# EAGLE board jataricartv5 (EAGLE 5.04)
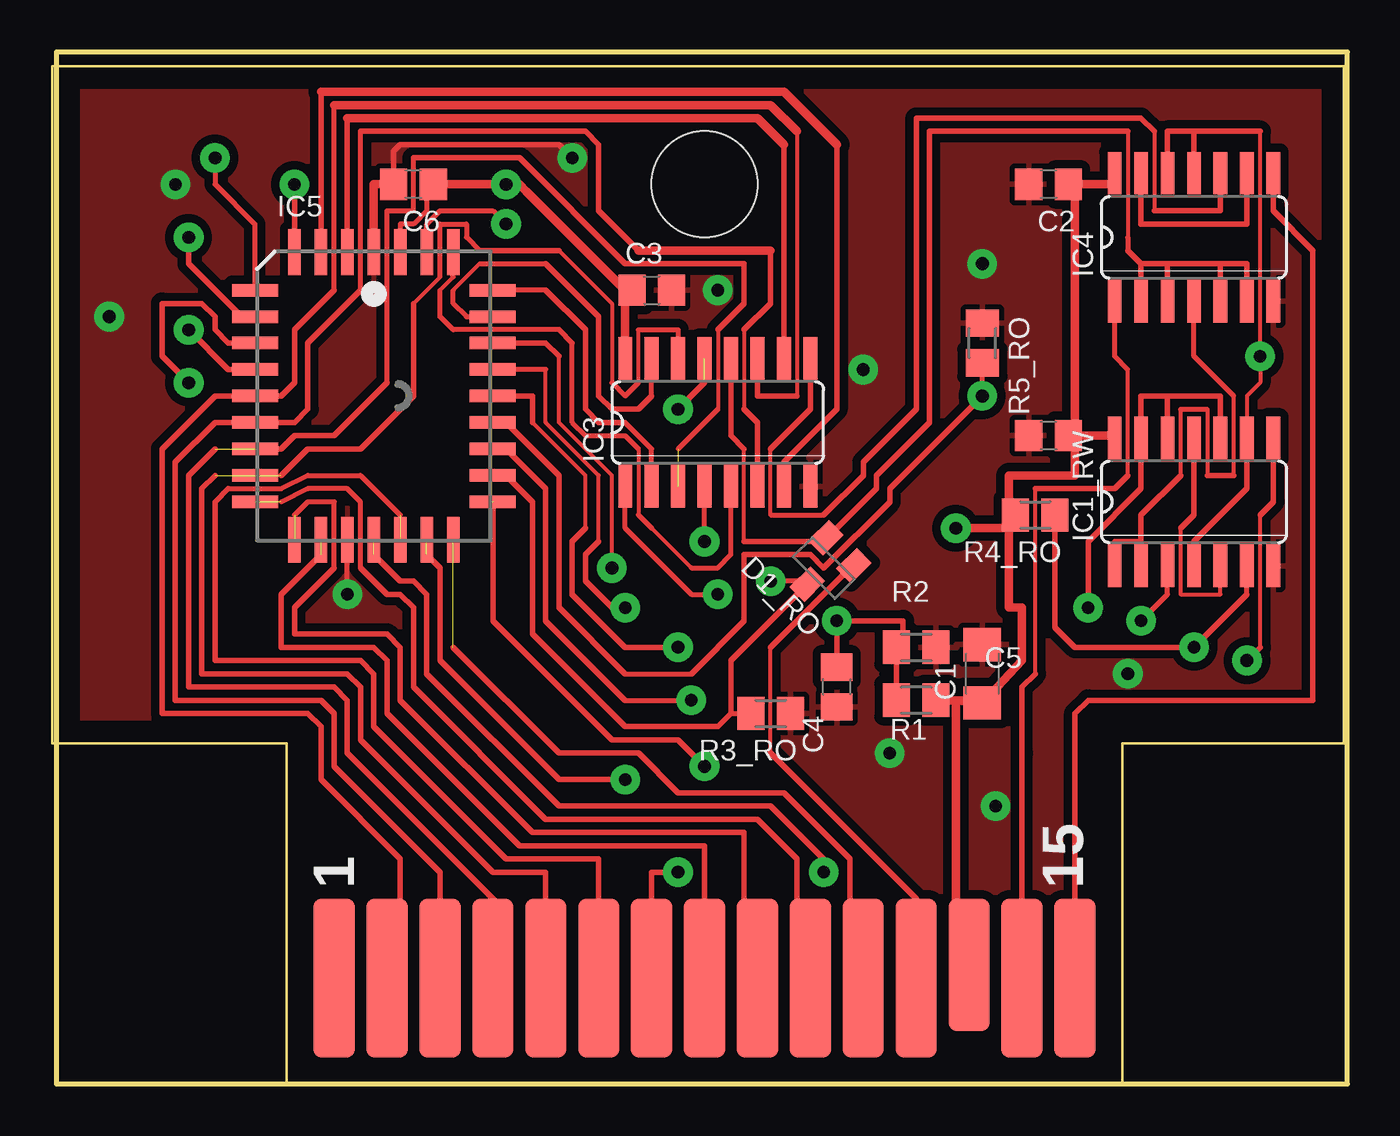
[diagram p0: board, top side]
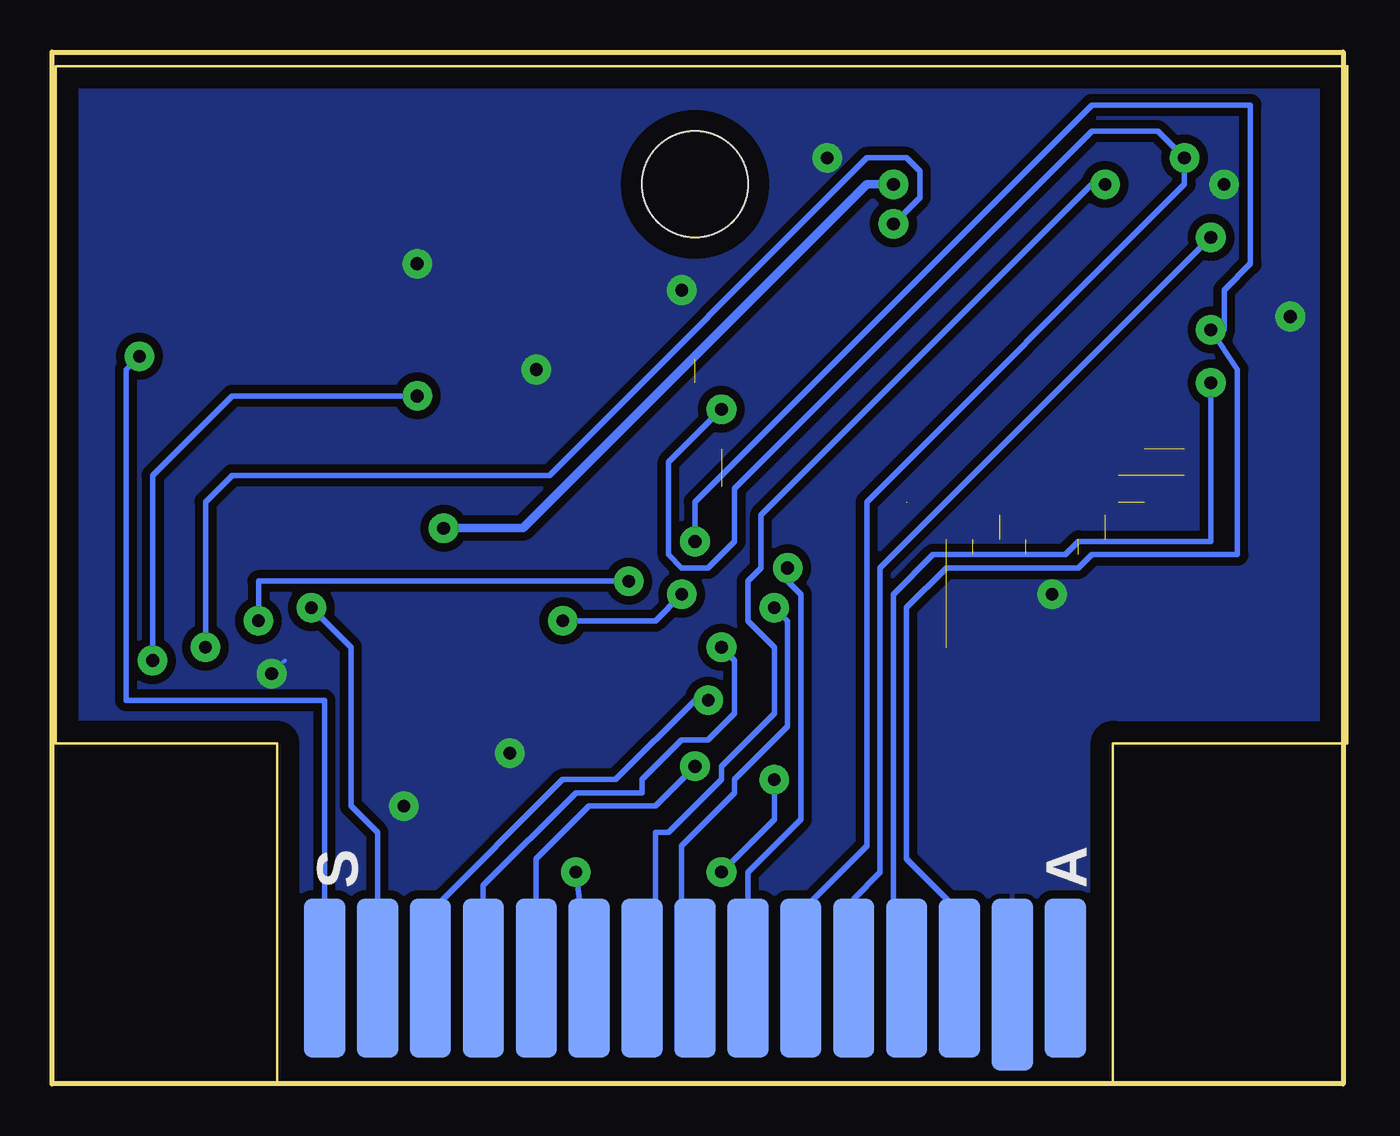
[diagram p1: board, bottom side, seen from below]

Size 61.98 x 49.53 mm. Coordinates in mm from the lower left corner, seen from the top.
Outline: 0,0 61.98,0 61.98,49.53 0,49.53 0,0
Copper layers (1*16): Top 0.035mm / dielectric 1.5mm / Bottom 0.035mm
Design rules "default *": minimum track width 8mil, minimum drill 24mil, track to track 8mil, track to pad 8mil, pad to pad 8mil, via to via 8mil, smd to smd 8mil, copper to edge 40mil, drill to drill 8mil, minimum pad ring 10mil, minimum via ring 20mil, stop-mask expansion 4mil, vias tented up to drill 0mil, thermal gap 10mil
Net classes: 1 power: clearance 0.406 mm
Holes 5.08 mm at 31.11,43.18

## Footprints (pad centres in the part's own frame; a part is rotated, then mirrored left to right if it is on the bottom)
C1206 = smd 1.6 x 1.8: 1 -1.4,0; 2 1.4,0
C0805 = smd 1.3 x 1.5: 1 -0.95,0; 2 0.95,0
CARTRIDGE = smd 1.981 x 7.62: 1 -17.78,-38.1; 2 -15.24,-38.1; 3 -12.7,-38.1; 4 -10.16,-38.1; 5 -7.62,-38.1; 6 -5.08,-38.1; 7 -2.54,-38.1; 8 0,-38.1; 9 2.54,-38.1; 10 5.08,-38.1; 11 7.62,-38.1; 12 10.16,-38.1; 14 15.24,-38.1; 15 17.78,-38.1 | smd 1.981 x 6.35: 13 12.7,-37.465 | smd 1.981 x 7.62 bottom: A -17.78,-38.1; C -12.7,-38.1; D -10.16,-38.1; E -7.62,-38.1; F -5.08,-38.1; H -2.54,-38.1; J 0,-38.1; K 2.54,-38.1; L 5.08,-38.1; M 7.62,-38.1; N 10.16,-38.1; P 12.7,-38.1; R 15.24,-38.1; S 17.78,-38.1 | smd 1.981 x 8.255 bottom: B -15.24,-38.417
SOT23C = smd 1 x 1.4: 1 -0.95,-1.1; 2 0.95,-1.1; 3 0,1.1
SO14 = smd 0.66 x 2.032: 1 -3.81,-3.073; 2 -2.54,-3.073; 3 -1.27,-3.073; 4 0,-3.073; 5 1.27,-3.073; 6 2.54,-3.073; 7 3.81,-3.073; 8 3.81,3.073; 9 2.54,3.073; 10 1.27,3.073; 11 0,3.073; 12 -1.27,3.073; 13 -2.54,3.073; 14 -3.81,3.073
SO16 = smd 0.66 x 2.032: 1 -4.445,-3.073; 2 -3.175,-3.073; 3 -1.905,-3.073; 4 -0.635,-3.073; 5 0.635,-3.073; 6 1.905,-3.073; 7 3.175,-3.073; 8 4.445,-3.073; 9 4.445,3.073; 10 3.175,3.073; 11 1.905,3.073; 12 0.635,3.073; 13 -0.635,3.073; 14 -1.905,3.073; 15 -3.175,3.073; 16 -4.445,3.073
PLCC32R = smd 0.6 x 2.2: 1 0,6.9; 2 -1.27,6.9; 3 -2.54,6.9; 4 -3.81,6.9; 14 -3.81,-6.9; 15 -2.54,-6.9; 16 -1.27,-6.9; 17 0,-6.9; 18 1.27,-6.9; 19 2.54,-6.9; 20 3.81,-6.9; 30 3.81,6.9; 31 2.54,6.9; 32 1.27,6.9 | smd 2.2 x 0.6: 5 -5.7,5.08; 6 -5.7,3.81; 7 -5.7,2.54; 8 -5.7,1.27; 9 -5.7,0; 10 -5.7,-1.27; 11 -5.7,-2.54; 12 -5.7,-3.81; 13 -5.7,-5.08; 21 5.7,-5.08; 22 5.7,-3.81; 23 5.7,-2.54; 24 5.7,-1.27; 25 5.7,0; 26 5.7,1.27; 27 5.7,2.54; 28 5.7,3.81; 29 5.7,5.08
M0805 = smd 1.3 x 1.6: 1 -0.95,0; 2 0.95,0

## Placement (x,y rotation side)
C1  10u  [C1206]  44.45,19.68 90 top
C2  100n  [C0805]  47.62,43.18 180 top
C3  100n  [C0805]  28.57,38.1 0 top
C4  1u  [C0805]  37.47,19.05 90 top
C5  100n  [C0805]  47.62,31.11 180 top
C6  100n  [C0805]  17.14,43.18 180 top
CART1  CARTRIDGE  [CARTRIDGE]  31.11,43.18 0 top
D1_RO  [SOT23C]  36.83,24.77 135 top
IC1_RW  7400D  [SO14]  54.61,27.94 0 top
IC3  74174D  [SO16]  31.75,31.75 0 top
IC4  7402D  [SO14]  54.61,40.64 0 top
IC5  AM29F040J  [PLCC32R]  15.24,33.02 0 top
R1  100k  [M0805]  41.27,18.41 0 top
R2  1M  [M0805]  41.27,20.95 180 top
R3_RO  4.7k  [M0805]  34.29,17.78 180 top
R4_RO  4.7k  [M0805]  46.99,27.3 180 top
R5_RO  4.7k  [M0805]  44.45,35.56 270 top

## Library data of the parts
C1-C6 R1 R2 R3_RO R4_RO R5_RO = rcl
CART1 = atari1
D1_RO = semicon-smd-ipc
IC1_RW IC3 IC4 = 74xx-eu
IC5 = am29-memory

## Nets
_CCTL: CART1.15 IC4.8
_CE: CART1.12 D1_RO.1
A0: CART1.5 IC3.14 IC5.12
A1: CART1.4 IC3.3 IC5.11
A2: CART1.3 IC3.6 IC5.10
A3: CART1.2 IC3.11 IC5.9
A4: CART1.C IC3.4 IC5.8
A5: CART1.D IC5.7
A6: CART1.E IC5.6
A7: CART1.F IC3.13 IC5.5
A8: CART1.H IC5.27
A9: CART1.J IC5.26
A10: CART1.P IC5.23
A11: CART1.N IC5.25
A12: CART1.K IC5.4
CLK: IC3.9 IC4.10
CLR: C4.2 IC3.1 R1.1 R2.2
D0: CART1.10 IC5.13
D1: CART1.9 IC5.14
D2: CART1.8 IC5.15
D3: CART1.L IC5.17
D4: CART1.6 IC5.18
D5: CART1.7 IC5.19
D6: CART1.11 IC5.20
D7: CART1.M IC5.21
GND [power]: C1.2 C2.2 C3.2 C4.1 C5.2 C6.2 CART1.B IC1_RW.7 IC3.8 IC4.7 IC5.1 IC5.16 R2.1 R3_RO.1 R5_RO.1
N$1: IC3.15 IC5.28
N$2: IC3.5 IC5.30
N$3: IC3.2 IC5.29
N$4: IC3.7 IC5.3
N$5: IC3.10 IC5.2
N$6: D1_RO.3 IC1_RW.3 IC5.22 R3_RO.2
N$7: CART1.14 IC4.1
N$8: IC1_RW.1 IC1_RW.2 IC4.4
N$9: IC1_RW.6 IC5.31 R4_RO.1
N$10: IC1_RW.8 IC5.24 R5_RO.2
N$11: IC1_RW.5 IC1_RW.11
N$12: IC4.9 IC4.13
PHI2: CART1.S IC1_RW.4 IC1_RW.9 IC4.11 IC4.12
R_W: CART1.R IC1_RW.10 IC1_RW.12 IC1_RW.13
RD5: D1_RO.2 IC3.12 IC4.2 IC4.3 IC4.5 IC4.6
VCC: C1.1 C2.1 C3.1 C5.1 C6.1 CART1.13 IC1_RW.14 IC3.16 IC4.14 IC5.32 R1.2 R4_RO.2

## Tracks (layer width: path | path; a pad name or v marks a point on that pad's centre or on a via)
_CCTL
  Top 0.229: 58.42,43.18 IC4.8
  Top 0.254: CART1.15 48.9,16.51 48.9,17.78 49.53,18.41 60.33,18.41 60.33,40.01 58.42,41.91 58.42,43.18
_CE
  Top 0.203: 34.29,15.88 34.29,20.95
  Top 0.229: 41.27,3.17 CART1.12 41.27,8.89 | 38.1,24.77 38.17,24.77 D1_RO.1
  Top 0.254: 41.27,8.89 34.29,15.88 | 34.29,20.95 38.1,24.77
A0  (2 unrouted)
  Top 0.203: 24.13,40.01 26.67,37.47 26.67,33.66 | 17.14,37.47 18.41,38.73 | 27.94,33.66 27.94,36.2
  Top 0.229: 20.32,40.01 19.68,40.64 19.68,41.27 18.41,41.27 18.41,38.73 | 26.67,33.66 27.3,33.02 27.94,33.66 | 27.94,36.2 29.84,36.2 IC3.14
  Top 0.254: 20.32,40.01 24.13,40.01 | 17.14,37.47 17.14,33.02 14.61,30.48 12.06,30.48 10.79,29.21 | 7.62,29.21 6.99,28.57 6.99,19.68 13.97,19.68 14.61,19.05 14.61,16.51 20.95,10.16 23.5,10.16 CART1.5
A1  (2 unrouted)
  Top 0.203: 31.75,36.2 31.75,32.38
  Top 0.229: CART1.4 20.95,3.81 21.59,3.81 21.59,8.26 | 31.75,32.38 29.84,30.48 | 15.88,33.66 15.88,41.91 17.14,41.91 17.14,44.45
  Top 0.254: 21.59,8.26 13.97,15.88 13.97,18.41 13.34,19.05 6.35,19.05 6.35,29.21 7.62,30.48 | 31.75,36.2 33.02,37.47 33.02,39.37 27.3,39.37 22.23,44.45 17.14,44.45 | 15.88,33.66 13.34,31.11 11.43,31.11 10.79,30.48 IC5.11
A2
  Top 0.203: 33.02,36.2 33.02,32.38
  Top 0.229: 19.05,4.45 CART1.3 | 14.61,38.1 14.61,45.72
  Top 0.254: CART1.3 18.41,10.16 13.34,15.24 13.34,17.78 12.7,18.41 5.71,18.41 5.71,29.84 7.62,31.75 IC5.10 11.43,31.75 12.06,32.38 12.06,35.56 14.61,38.1 | IC3.6 33.66,31.75 33.02,32.38 | 34.29,40.01 34.29,37.47 33.02,36.2 | 27.94,40.01 26.04,41.91 26.04,45.09 25.4,45.72 14.61,45.72
  Top 0.406: 27.94,40.01 34.29,40.01
A3
  Top 0.203: 35.56,45.72 35.56,33.02
  Top 0.229: CART1.2 16.51,3.85 16.51,3.81 | 13.34,38.1 13.34,46.99
  Top 0.254: 16.51,3.85 16.51,10.79 12.7,14.61 12.7,17.14 12.06,17.78 5.08,17.78 5.08,30.48 7.62,33.02 IC5.9 10.79,33.02 11.43,33.66 11.43,36.2 13.34,38.1 | 35.56,33.02 33.66,33.02 IC3.11
  Top 0.406: 13.34,46.99 34.29,46.99 35.56,45.72
A4  (via drill 0.61)
  Top 0.229: v31.11,26.04 IC3.4
  Top 0.254: v6.35,36.2 8.26,34.29 IC5.8
  Bottom 0.229: 18.41,3.81 CART1.C 18.41,8.26 | v6.35,36.2 5.71,36.2
  Bottom 0.254: 18.41,8.26 20.95,10.79 20.95,22.86 19.05,24.77 12.7,24.77 12.06,25.4 5.08,25.4 5.08,34.29 v6.35,36.2 | v31.11,26.04 31.11,27.94 12.06,46.99 4.45,46.99 4.45,39.37 5.71,38.1 5.71,36.2
A5  (via drill 0.61)
  Top 0.254: v6.35,33.66 5.08,34.92 5.08,37.47 6.99,37.47 7.62,36.83 7.62,36.2 8.26,35.56 IC5.7
  Bottom 0.229: 21.59,8.89 20.95,8.26 CART1.D 20.95,4.45
  Bottom 0.254: 21.59,8.89 21.59,23.5 19.68,25.4 13.34,25.4 12.7,26.04 6.35,26.04 v6.35,33.66
A6  (via drill 0.61)
  Top 0.229: 8.89,36.83 IC5.6
  Top 0.254: 8.89,36.83 6.35,39.37 v6.35,40.64
  Bottom 0.229: CART1.E 23.5,8.89
  Bottom 0.254: v6.35,40.64 22.23,24.77 22.23,10.16 23.5,8.89
A7  (via drill 0.61)  (1 unrouted)
  Top 0.229: IC5.5 9.53,38.1 9.53,41.27 7.62,43.18 v7.62,44.45
  Top 0.254: v29.84,32.38 31.11,33.66
  Bottom 0.229: 26.04,5.71 CART1.F 26.67,5.08 26.67,5.71 26.04,5.71 | 26.04,5.71 26.04,8.26
  Bottom 0.254: 26.04,8.26 22.86,11.43 22.86,27.94 7.62,43.18 v7.62,44.45 8.89,45.72 12.06,45.72 29.21,28.57 29.21,26.04 30.48,24.77 31.75,24.77 32.38,25.4 32.38,29.84 v29.84,32.38
A8  (via drill 0.61)
  Top 0.203: 24.13,34.92 24.13,31.75 26.67,29.21 v26.67,24.77
  Top 0.254: 24.13,34.92 23.5,35.56 IC5.27
  Bottom 0.254: v26.67,24.77 26.67,24.13 26.04,23.5 26.04,12.7 28.57,10.16 CART1.H
A9  (via drill 0.61)
  Top 0.203: 23.5,34.29 23.5,31.75 26.04,29.21 26.04,26.04
  Top 0.229: 23.5,34.29 IC5.26
  Top 0.254: v27.3,22.86 26.67,22.86 25.4,24.13 25.4,25.4 26.04,26.04
  Bottom 0.229: 31.75,8.26 31.11,8.26 CART1.J
  Bottom 0.254: v27.3,22.86 26.67,22.23 26.67,17.14 29.21,14.61 29.21,13.97 31.75,11.43 31.75,8.26
A10  (via drill 0.61)
  Top 0.229: 21.59,30.48 IC5.23 | 27.3,18.41 v30.48,18.41
  Top 0.254: 21.59,30.48 23.5,28.57 23.5,22.23 27.3,18.41
  Bottom 0.229: 44.45,4.45 CART1.P 43.81,8.26 | v30.48,18.41 31.11,18.41
  Bottom 0.254: 31.11,18.41 34.92,14.61 37.47,14.61 43.81,8.26
A11  (via drill 0.61)
  Top 0.203: 22.86,31.75 25.4,29.21 25.4,26.67
  Top 0.254: IC5.25 22.86,33.02 22.86,31.75 | 25.4,26.67 24.77,26.04 24.77,23.5 27.3,20.95 v29.84,20.95
  Bottom 0.229: CART1.N 41.91,5.08
  Bottom 0.254: v29.84,20.95 29.21,20.32 29.21,17.78 30.48,16.51 31.75,16.51 33.66,14.61 33.66,13.97 36.83,13.97 41.27,9.53 CART1.N
A12  (via drill 0.61)
  Top 0.254: v11.43,43.18 IC5.4
  Bottom 0.229: CART1.K 33.02,3.17 33.02,7.62 | 33.02,7.62 33.02,10.79 | 33.02,7.62 33.66,6.99 CART1.K | 33.66,3.17 CART1.K
  Bottom 0.254: 33.02,7.62 33.02,12.06 32.38,12.06 29.84,14.61 29.84,15.24 27.3,17.78 27.3,20.95 28.57,22.23 28.57,24.13 27.94,24.77 27.94,27.3 12.06,43.18 v11.43,43.18
CLK
  Top 0.203: 34.29,27.3 34.29,30.48 | 52.7,45.72 52.7,41.91
  Top 0.229: 34.29,27.3 36.83,27.3
  Top 0.254: IC3.9 36.2,32.38 34.29,30.48 | IC4.10 55.88,41.91 52.7,41.91 | 36.83,27.3 38.73,29.21 38.73,29.84 41.27,32.38 41.27,46.35 52.07,46.35 52.7,45.72
CLR  (via drill 0.61)
  Top 0.229: 40.64,20.95 R2.2 | IC3.1 27.3,26.67 30.48,23.5 v31.75,23.5
  Top 0.254: R2.2 R1.1 | 40.64,20.95 40.64,22.23 v37.47,22.23 C4.2
  Bottom 0.254: v31.75,23.5 33.02,22.23 v37.47,22.23
D0  (1 unrouted)
  Top 0.229: 35.56,3.17 CART1.10 | 14.61,24.77 14.61,27.94 13.97,28.57 12.06,28.57 10.79,27.94
  Top 0.254: 14.61,24.77 15.88,23.5 16.51,23.5 17.14,22.86 17.14,19.05 23.5,12.7 33.66,12.7 35.56,10.79 35.56,3.17
D1  (1 unrouted)
  Top 0.229: 11.43,27.3 12.06,27.94 13.34,27.94 13.34,24.77 | 33.02,5.08 CART1.9
  Top 0.254: 13.34,24.77 11.43,22.86 11.43,21.59 15.88,21.59 16.51,20.95 16.51,18.41 22.86,12.06 33.02,12.06 33.02,5.08
D2  (1 unrouted)
  Top 0.229: CART1.8 31.75,3.85
  Top 0.254: CART1.8 31.11,11.43 22.23,11.43 15.88,17.78 15.88,20.32 15.24,20.95 10.79,20.95 10.79,23.5 12.7,25.4
D3  (via drill 0.61)  (1 unrouted)
  Top 0.254: v36.83,10.16 36.83,10.79 34.29,13.34 24.13,13.34 17.78,19.68 17.78,23.5 17.14,24.13 16.51,24.13 15.24,25.4
  Bottom 0.229: CART1.L 36.83,4.45
  Bottom 0.254: v36.83,10.16 CART1.L
D4  (1 unrouted)
  Top 0.229: 8.26,28.57 10.79,28.57 12.06,29.21 14.61,29.21 16.51,27.3 | 26.04,3.85 CART1.6
  Top 0.254: 8.26,28.57 7.62,27.94 7.62,20.32 14.61,20.32 15.24,19.68 15.24,17.14 21.59,10.79 26.04,10.79 CART1.6
D5  (via drill 0.61)  (1 unrouted)
  Top 0.229: 29.21,3.85 CART1.7
  Top 0.254: v29.84,10.16 28.57,10.16 CART1.7 | v27.3,14.61 24.13,14.61 18.41,20.32 18.41,24.77 17.78,25.4
  Bottom 0.254: v29.84,10.16 27.3,12.7 v27.3,14.61
D6  (1 unrouted)
  Top 0.229: 38.1,3.85 CART1.11
  Top 0.254: 38.1,3.85 38.1,10.79 34.92,13.97 29.84,13.97 27.94,15.88 24.13,15.88 19.05,20.95
D7  (via drill 0.61)  (1 unrouted)
  Top 0.254: v31.11,15.24 29.84,16.51 26.67,16.51 20.95,22.23 20.95,27.93
  Bottom 0.254: CART1.M 38.73,10.79 36.2,13.34 33.02,13.34 v31.11,15.24
GND  (via drill 0.61)
  Top 0.229: v13.97,23.5 IC5.16
  Top 0.254: C6.2 16.2,44.77 16.51,45.09 24.13,45.09 v24.77,44.45
  Top 0.406: IC5.1 15.24,43.18 C6.2
  Bottom 0.203: v51.44,19.68 50.8,20.32
  other vias: 31.75,38.1 44.45,39.37 40.01,15.88 45.09,13.34 2.54,36.83 38.73,34.29 5.71,43.18
  pour Top: 0,50.8 63.5,50.8 63.5,8.89 0,8.89
  pour Bottom: -1.27,63.5 0.64,8.26 66.67,8.26 66.04,63.5
N$1
  Top 0.203: 19.05,38.1 20.32,39.37
  Top 0.229: 28.57,33.02 IC3.15 | 20.32,39.37 23.5,39.37 | 19.05,38.1 19.05,37.47 19.68,36.83 IC5.28
  Top 0.254: 28.57,33.02 27.94,32.38 26.67,32.38 26.04,33.02 26.04,36.83 23.5,39.37
N$2
  Top 0.203: 18.41,38.1 19.05,38.73 | 28.57,26.67 30.48,24.77 | 27.94,30.48 27.94,27.3
  Top 0.229: 19.05,38.73 IC5.30 | 18.41,38.1 18.41,36.83 19.05,36.2 24.13,36.2 | 24.77,35.56 24.77,31.75 25.4,31.11 27.3,31.11 27.94,30.48 | IC3.5 32.38,25.4 31.75,24.77 30.48,24.77 | 27.94,27.3 28.57,26.67
  Top 0.254: 24.77,35.56 24.13,36.2
N$3
  Top 0.229: IC3.2 28.57,30.48 27.3,31.75 | 23.5,38.1 IC5.29
  Top 0.254: 27.3,31.75 26.04,31.75 25.4,32.38 25.4,36.2 23.5,38.1
N$4
  Top 0.229: 34.92,29.84 IC3.7
  Top 0.254: 34.92,29.84 37.47,32.38 37.47,45.09 | IC5.3 12.7,47.62
  Top 0.406: 37.47,45.09 34.92,47.62 12.7,47.62
N$5
  Top 0.254: 34.92,45.09 IC3.10 | IC5.2 13.97,46.35
  Top 0.406: 34.92,45.09 33.66,46.35 13.97,46.35
N$6  (via drill 0.61)
  Top 0.229: 21.59,29.21 IC5.22 | 31.75,17.14 32.38,17.78 R3_RO.2 | D1_RO.3 36.2,24.13 v34.29,24.13 | IC1_RW.3 53.34,23.5 v52.07,22.23
  Top 0.254: 21.59,29.21 22.86,27.94 22.86,21.59 27.3,17.14 31.75,17.14 | 32.38,17.78 32.38,20.32 D1_RO.3
  Bottom 0.254: v34.29,24.13 52.07,24.13 v52.07,22.23
N$7
  Top 0.203: 51.44,29.21 51.44,34.29 | 46.99,19.68 46.99,28.57
  Top 0.229: 46.35,3.92 CART1.14 | IC4.1 50.8,34.92 51.44,34.29
  Top 0.254: 51.44,29.21 50.8,28.57 46.99,28.57 | CART1.14 46.35,15.88 46.35,19.05 46.99,19.68
N$8
  Top 0.203: 53.98,29.21 53.98,32.38 | 55.24,32.38 55.24,29.21 | 56.52,29.21 56.52,33.02
  Top 0.229: 50.8,26.04 IC1_RW.1 | IC1_RW.2 52.07,26.04 | 53.98,32.38 55.24,32.38 | 56.52,33.02 54.61,34.92 IC4.4
  Top 0.254: 50.8,26.04 52.07,26.04 52.07,27.3 53.98,29.21 | 55.24,29.21 56.52,29.21
N$9  (via drill 0.61)
  Top 0.229: 57.15,23.5 IC1_RW.6 | IC5.31 17.78,41.27 18.41,41.91 20.95,41.91 v21.59,41.27
  Top 0.254: 57.15,23.5 v54.61,20.95 48.9,20.95 47.94,21.91 R4_RO.1
  Bottom 0.254: v21.59,41.27 20.32,42.55 20.32,43.81 20.95,44.45 22.86,44.45 38.1,29.21 53.34,29.21 54.61,27.94 v54.61,20.95
N$10  (via drill 0.61)
  Top 0.203: 21.59,31.75 IC5.24 | 57.78,20.95 57.78,27.3
  Top 0.229: 27.3,19.68 30.48,19.68 | v44.45,33.02 R5_RO.2
  Top 0.254: 21.59,31.75 24.13,29.21 24.13,22.86 27.3,19.68 | 30.48,19.68 33.02,22.23 33.02,25.4 36.2,25.4 36.83,24.77 40.01,27.94 40.01,28.57 v44.45,33.02 | IC1_RW.8 58.42,27.94 57.78,27.3 | v57.15,20.32 57.78,20.95
  Bottom 0.254: v44.45,33.02 53.34,33.02 57.15,29.21 v57.15,20.32
N$11
  Top 0.203: 53.98,26.67 53.98,23.5 55.88,23.5 IC1_RW.5
  Top 0.254: IC1_RW.11 54.61,27.3 53.98,26.67
N$12
  Top 0.254: IC4.13 52.07,41.27 57.15,41.27 IC4.9
PHI2  (via drill 0.61)
  Top 0.203: IC1_RW.9 57.15,33.02 57.78,33.66 v57.78,34.92 57.78,45.72
  Top 0.229: 54.61,26.04 IC1_RW.4 54.61,24.77
  Top 0.254: 54.61,45.72 53.34,45.72 IC4.12 | 54.61,45.72 IC4.11 | 57.78,45.72 54.61,45.72 | IC1_RW.9 57.15,28.57 54.61,26.04
  Bottom 0.229: 49.53,3.1 CART1.S
  Bottom 0.254: CART1.S 48.9,18.41 58.42,18.41 58.42,34.29 v57.78,34.92
R_W  (via drill 0.61)
  Top 0.254: IC1_RW.10 55.88,33.02 53.34,33.02 | 53.34,33.02 IC1_RW.12 | 53.34,33.02 52.07,33.02 IC1_RW.13 52.07,28.57 49.53,26.04 v49.53,22.86
  Bottom 0.254: v49.53,22.86 47.62,20.95 47.62,13.34 46.35,12.06 CART1.R
RD5
  Top 0.203: 33.02,26.04 33.02,30.48 | 51.44,45.72 51.44,40.64 | 37.47,26.67 D1_RO.2 | 57.15,38.1 IC4.6
  Top 0.229: 36.83,26.04 37.47,26.67 | 51.44,40.64 51.44,40.01
  Top 0.254: IC3.12 32.38,31.11 33.02,30.48 | 33.02,26.04 36.83,26.04 | 37.47,26.67 39.37,28.57 39.37,29.21 41.91,31.75 41.91,45.72 51.44,45.72 | 53.34,39.37 IC4.3 | 53.34,39.37 55.88,39.37 | 57.15,38.1 57.15,39.37 55.88,39.37 | 52.07,39.37 IC4.2 | 52.07,39.37 53.34,39.37 | 55.88,39.37 IC4.5 | 51.44,40.01 52.07,39.37
VCC  (via drill 0.61)
  Top 0.203: 48.9,43.18 C2.1 | 48.9,31.11 C5.1
  Top 0.229: CART1.13 44.45,5.08 | CART1.13 44.45,5.71 | CART1.13 43.18,5.71 | 44.58,18.41 C1.1 43.69,18.41 | 50.8,44.45 IC4.14 50.8,43.18 | 17.78,43.18 18.09,43.49 C6.1 18.09,42.87 | 27.3,38.1 C3.1 | 18.41,43.18 18.09,42.87 | IC5.32 16.51,41.27 17.14,41.27 17.78,41.91 17.78,42.55 18.09,42.87 | 50.7,31.11 IC1_RW.14 | R4_RO.2 46.04,27.62 45.72,27.94
  Top 0.406: 43.18,5.71 43.18,18.41 C1.1 | 44.58,18.41 46.35,20.32 46.35,22.86 45.72,22.86 45.72,26.67 | 43.69,18.41 R1.2 | IC3.16 27.3,38.1 22.54,42.86 22.23,43.18 v21.59,43.18 20.95,43.18 18.41,43.18 | 45.72,26.67 v43.18,26.67 | 45.72,26.67 45.72,27.94 45.72,29.21 48.9,29.21 48.9,31.11 | 50.8,43.18 48.9,43.18 48.9,31.11 | 48.9,31.11 50.7,31.11
  Bottom 0.406: v43.18,26.67 39.37,26.67 22.86,43.18 v21.59,43.18

## Text on the board
tDocu: Back/Rear
bDocu: Top/Front | 256kB UniFlashCart | (c) 2012 Jakub Husak